# EAGLE board photodiode_breakout (EAGLE 8.2.1)
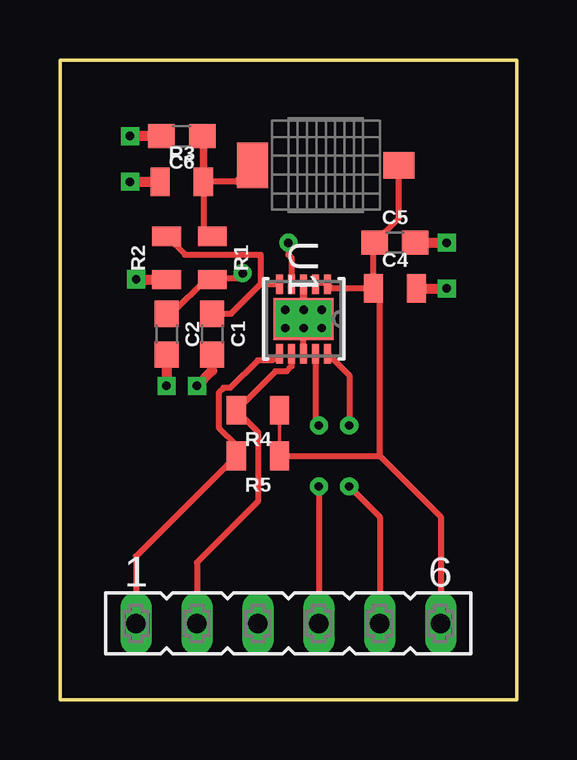
[diagram p0: board, top side]
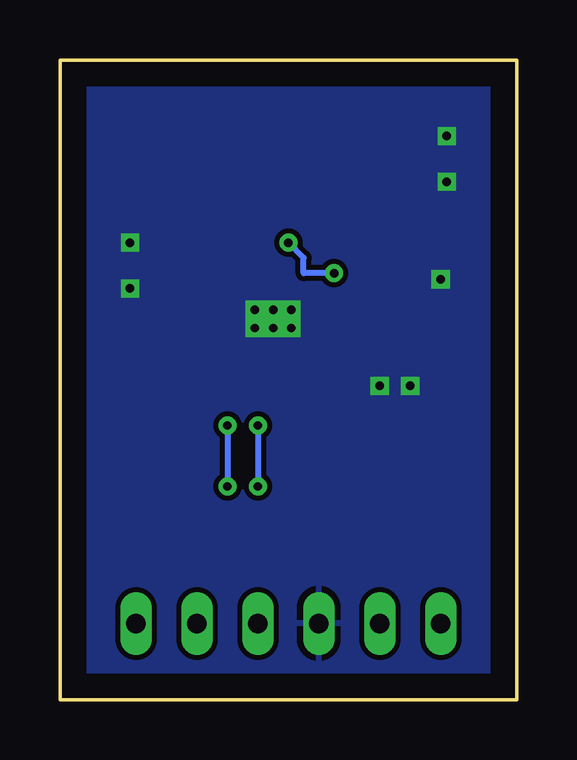
[diagram p1: board, bottom side, seen from below]

Size 19.05 x 26.67 mm. Coordinates in mm from the lower left corner, seen from the top.
Outline: 0,0 19.05,0 19.05,26.67 0,26.67 0,0
Copper layers (1*16): Top 0.035mm / dielectric 1.5mm / Bottom 0.035mm
Design rules "default *": minimum track width 6mil, minimum drill 0.35mm, track to track 8mil, track to pad 8mil, pad to pad 8mil, via to via 8mil, smd to smd 6mil, copper to edge 40mil, drill to drill 6mil, minimum pad ring 10mil, minimum via ring 8mil, stop-mask expansion 4mil, vias tented up to drill 0mil, thermal gap 10mil

## Footprints (pad centres in the part's own frame; a part is rotated, then mirrored left to right if it is on the bottom)
0603 = smd 1.1 x 1: 1 -0.85,0; 2 0.85,0
0805 = smd 0.8 x 1.2: 1 -0.9,0; 2 0.9,0
FE06 = drill 0.813 long: 1 -6.35,0; 2 -3.81,0; 3 -1.27,0; 4 1.27,0; 5 3.81,0; 6 6.35,0
DFN-10_DD = smd 0.813 x 0.305: 1 -1.448,1; 2 -1.448,0.5; 3 -1.448,0; 4 -1.448,-0.5; 5 -1.448,-1; 6 1.448,-1; 7 1.448,-0.5; 8 1.448,0; 9 1.448,0.5; 10 1.448,1 | smd 1.753 x 2.489: 11 0,0
DIL = smd 1.3 x 1.1: P$1 -0.165,-0.055 | smd 1.3 x 1.9: P$2 5.935,-0.055

## Placement (x,y rotation side)
C1  0.1uF  [0603]  6.35,15.24 270 top
C2  0.1uF  [0603]  4.45,15.24 270 top
C4  1.0uF  [0805]  13.97,17.14 0 top
C5  0.1uF  [0603]  13.97,19.05 0 top
C6  0.1uF  [0603]  5.08,23.5 180 top
J1  [FE06]  9.53,3.17 0 top
R1  10k  [0805]  6.35,18.41 270 top
R2  10k  [0805]  4.45,18.41 90 top
R3  20k  [0805]  5.08,21.59 0 top
R4  2.2K  [0805]  8.25,12.06 180 top
R5  2.2K  [0805]  8.25,10.16 180 top
U1  LTC2483IDD  [DFN-10_DD]  10.16,15.88 270 top
U$1  SFH-2430-Z  [DIL]  13.97,22.23 180 top

## Library data of the parts
C1 C2 = SparkFun-Capacitors; PROD_ID: CAP-08604
C4 = SparkFun-Capacitors; PROD_ID: CAP-08064
C5 C6 = SparkFun-Capacitors; PROD_ID: CAP-08390
J1 = con-lsta; OC_FARNELL: unknown; OC_NEWARK: unknown
R1-R5 = SparkFun-Resistors
U1 = LTC2483idd; MANUFACTURER_PART_NUMBER: ltc2483idd; VENDOR: Linear Technology
U$1 = SFH 2430 Z

## Nets
GND: C1.2 C2.2 C4.2 C5.2 C6.2 J1.3 R2.1 R3.1 U1.3 U1.8 U1.11
N$1: J1.1 R5.2 U1.6
N$2: C1.1 R2.2 U1.5
N$3: C2.1 R1.2 U1.4
N$4: J1.2 R4.2 U1.7
N$6: J1.4 U1.9
N$7: J1.5 U1.10
N$8: C6.1 R1.1 R3.2 U$1.P$2
VCC: C4.1 C5.1 J1.6 R4.1 R5.1 U1.1 U1.2 U$1.P$1

## Tracks (layer width: path | path; a pad name or v marks a point on that pad's centre or on a via)
GND  (via drill 0.35)
  Top 0.254: U1.8 10.16,15.24 | v10.16,15.49 U1.11 10.16,16.51
  Top 0.305: 10.16,16.51 U1.3 | v10.16,15.49 10.16,15.24
  Top 0.406: C5.2 v16.13,19.05 | C4.2 v16.13,17.14 | v5.71,13.08 6.35,13.72 C1.2 | C2.2 v4.45,13.08 | v3.17,17.53 v3.19,17.52 R2.1 | C6.2 v2.92,23.5 | v2.92,21.59 R3.1
  other vias: 9.4,16.26 9.4,15.49 10.16,16.26 10.92,16.26 10.92,15.49
  pour Bottom: 0,0 0,26.67 19.05,26.67 19.05,0
N$1
  Top 0.254: U1.6 8.88,14.15 8.25,14.15 7.1,13 6.82,13 6.62,12.8 6.62,11.33 7.36,10.6 R5.2 | R5.2 6.99,9.79 | R5.2 3.17,5.98 J1.1
N$2
  Top 0.254: 8.37,17.32 U1.5 | R2.2 5.21,18.55 8.37,18.55 8.37,17.32 | C1.1 7.14,16.09 8.37,17.32
N$3  (via drill 0.35)
  Top 0.254: U1.4 9.66,18.41 9.53,18.55 v9.53,19.05 | C2.1 4.66,16.09 6.08,17.52 R1.2 6.4,17.57 7.41,17.57 v7.62,17.78
  Bottom 0.254: v7.62,17.78 8.89,17.78 8.89,18.41 v9.53,19.05
N$4
  Top 0.254: J1.2 5.71,5.71 8.25,8.25 8.25,11.16 R4.2 8.98,13.69 9.45,13.69 9.66,13.9 U1.7
N$6  (via drill 0.35)
  Top 0.254: v10.79,8.89 J1.4 | U1.9 10.66,11.56 v10.79,11.43
  Bottom 0.254: v10.79,11.43 v10.79,8.89
N$7  (via drill 0.35)
  Top 0.254: U1.10 12.06,13.52 v12.06,11.43 | v12.06,8.89 13.33,7.62 J1.5
  Bottom 0.254: v12.06,11.43 v12.06,8.89
N$8
  Top 0.254: U$1.P$2 7.35,21.59 R3.2 5.98,19.69 R1.1
  Top 0.305: 6.04,21.64 R3.2 5.98,23.45 C6.1
VCC
  Top 0.152: U1.1 U1.2 | R5.1 R4.1
  Top 0.254: R5.1 13.33,10.16 | 13.33,10.16 13.33,16.88 C4.1 | C4.1 11.34,17.14 U1.1 | C4.1 13.07,19 C5.1 14.13,20.06 U$1.P$1 | 13.33,10.16 15.88,7.62 J1.6

## Text on the board
tDocu: SCL | SDA | GND | CA1 | CA0 | VCC
bDocu: Jerrold Erickson / Aaron Adler | Photodiode Amplifier / Revision 1